# EAGLE board strobeshnik (EAGLE 5.04)
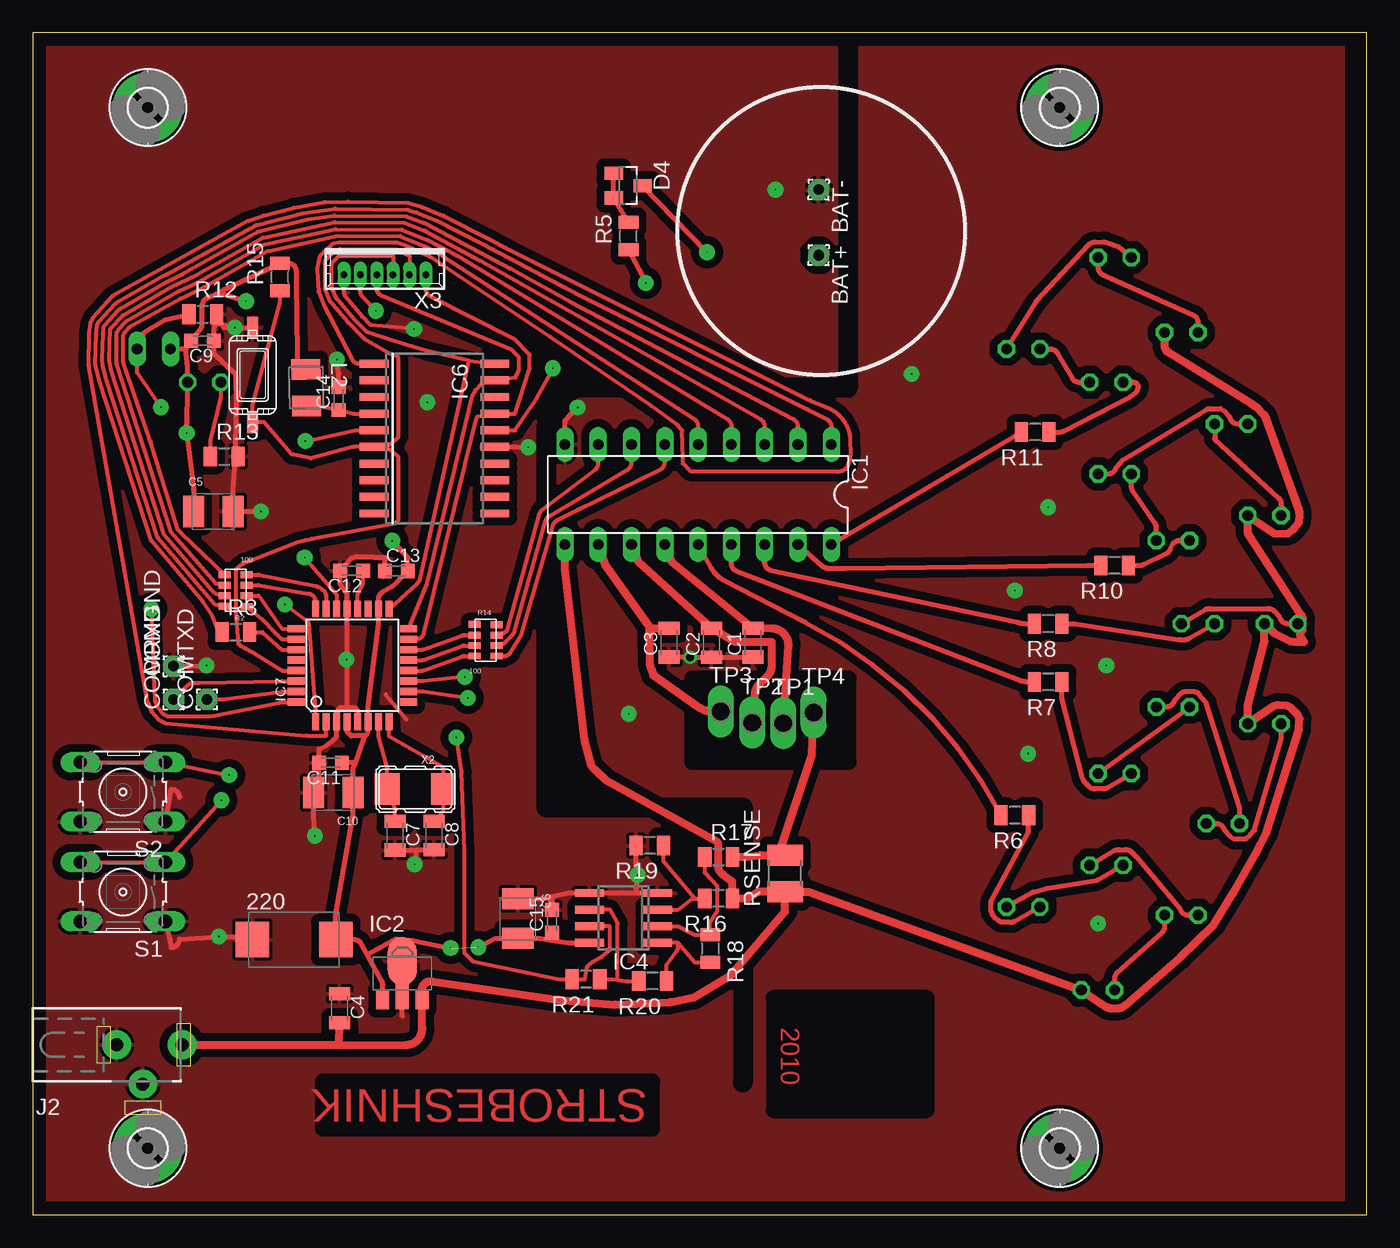
[diagram p0: board, top side]
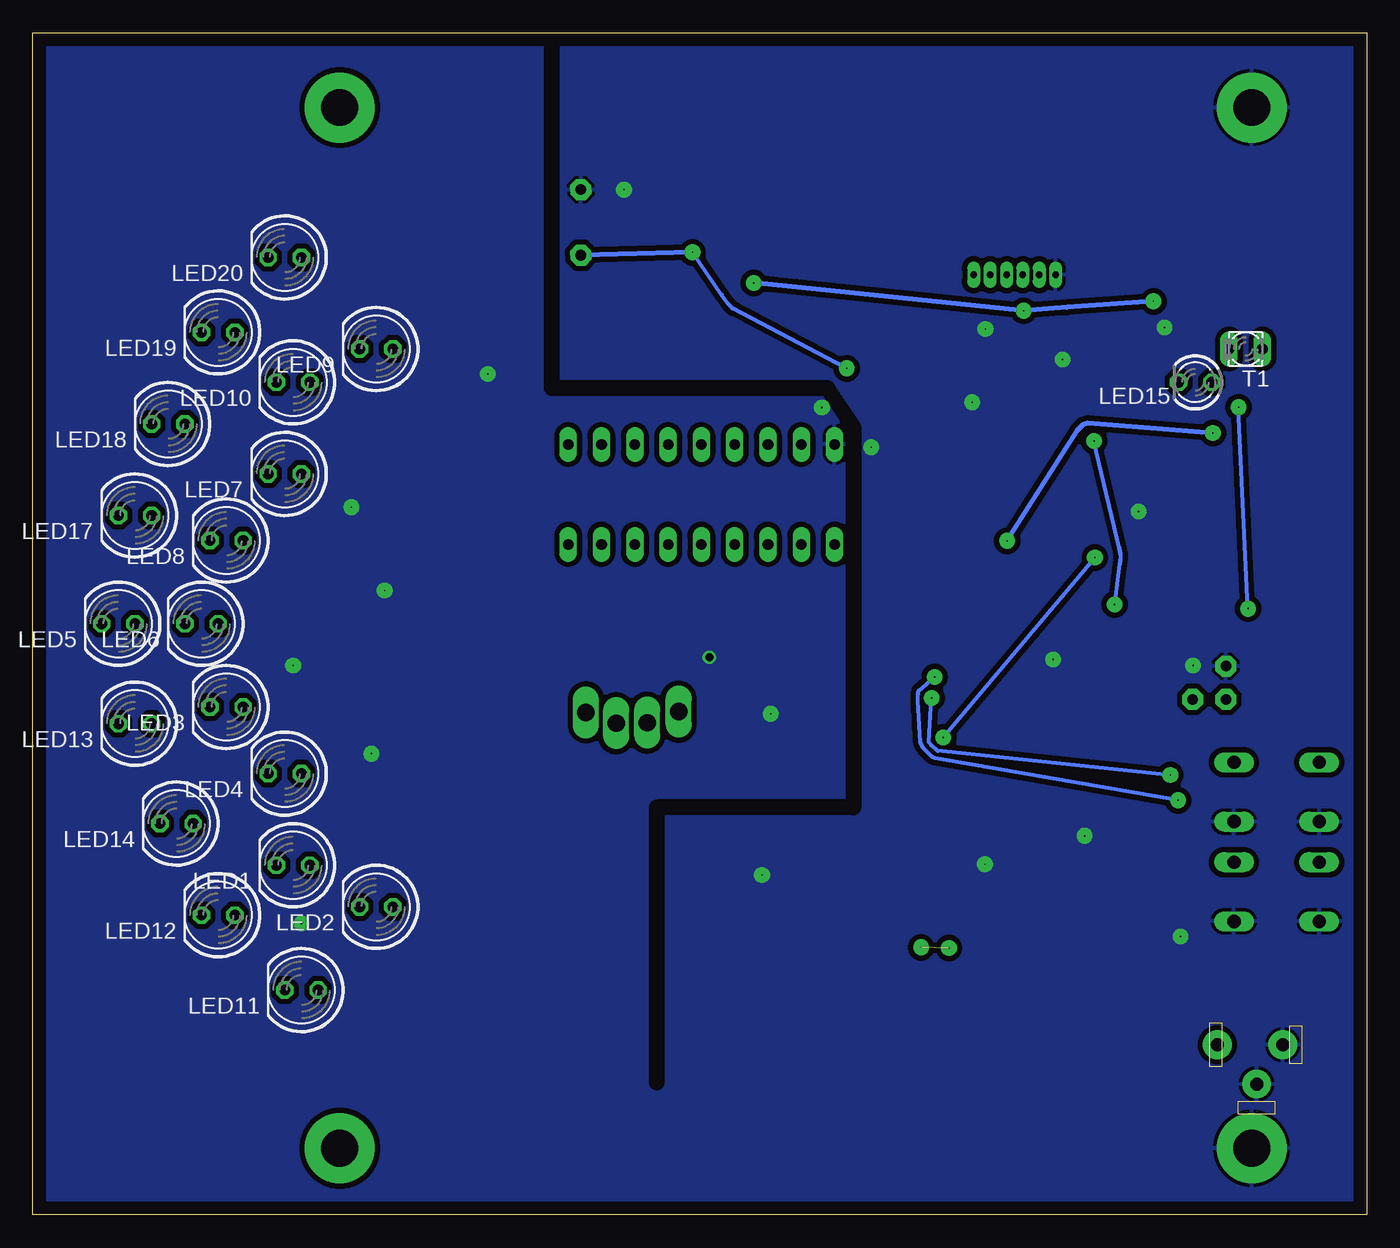
[diagram p1: board, bottom side, seen from below]

Size 101.78 x 90.16 mm. Coordinates in mm from the lower left corner, seen from the top.
Outline: 101.78,90.16 0,90.16 0,0 101.78,0 101.78,90.16
Copper layers (1*16): Top 0.035mm / dielectric 1.5mm / Bottom 0.035mm
Design rules "default": minimum track width 10mil, minimum drill 24mil, track to track 8mil, track to pad 8mil, pad to pad 8mil, via to via 8mil, smd to smd 8mil, copper to edge 40mil, drill to drill 8mil, minimum pad ring 10mil, minimum via ring 8mil, stop-mask expansion 4mil, vias tented up to drill 0mil, thermal gap 10mil
Net classes: 0 default: width 0.3 mm, drill 0.6 mm, clearance 0.25 mm; 1 supply1: width 0.4 mm, drill 0.6 mm, clearance 0.4 mm; 2 supply2: width 0.6 mm, drill 0.6 mm, clearance 0.4 mm
tRestrict: area 56.5,8 to 68.2,16.6; area 50.3,34.5 to 62.2,40.9; area 22.1,6.6 to 47.3,10.2; 6 lines
bRestrict: 6 lines

## Footprints (pad centres in the part's own frame; a part is rotated, then mirrored left to right if it is on the bottom)
D/7343-31R = smd 2.55 x 2.7: + 3.175,0; - -3.175,0
1,6/0,8 = drill 0.813 pad 1.6 octagon: 1 0,0
C0805K = smd 1 x 1.6: 1 -1.1,0; 2 1.1,0
SMC_B = smd 1.6 x 2.4: + -1.5,0; - 1.5,0
C0603K = smd 1.05 x 1.08: 1 -0.875,0; 2 0.875,0
SOT23@1 = smd 1 x 1.4: 1 -0.95,-1.1; 2 0.95,-1.1; 3 0,1.1
2,8-PAD = drill 2.8 pad 5.334 round: B2,8 0,0
DIL18 = drill 0.813 long: 1 -10.16,-3.81; 2 -7.62,-3.81; 3 -5.08,-3.81; 4 -2.54,-3.81; 5 0,-3.81; 6 2.54,-3.81; 7 5.08,-3.81; 8 7.62,-3.81; 9 10.16,-3.81; 10 10.16,3.81; 11 7.62,3.81; 12 5.08,3.81; 13 2.54,3.81; 14 0,3.81; 15 -2.54,3.81; 16 -5.08,3.81; 17 -7.62,3.81; 18 -10.16,3.81
SOT89 = smd 1 x 1.5: 1 -1.499,-1.981; 3 1.499,-1.981 | smd 1 x 2: 2 0,-1.727 | smd 2.2 x 3.7: 2@1 0,0.94
SO08 = smd 0.6 x 2.2: 1 -1.905,-2.6; 2 -0.635,-2.6; 3 0.635,-2.6; 4 1.905,-2.6; 5 1.905,2.6; 6 0.635,2.6; 7 -0.635,2.6; 8 -1.905,2.6
SO-20DW = smd 0.6 x 2.2: 1 -5.715,-4.6; 2 -4.445,-4.6; 3 -3.175,-4.6; 4 -1.905,-4.6; 5 -0.635,-4.6; 6 0.635,-4.6; 7 1.905,-4.6; 8 3.175,-4.6; 9 4.445,-4.6; 10 5.715,-4.6; 11 5.715,4.6; 12 4.445,4.6; 13 3.175,4.6; 14 1.905,4.6; 15 0.635,4.6; 16 -0.635,4.6; 17 -1.905,4.6; 18 -3.175,4.6; 19 -4.445,4.6; 20 -5.715,4.6
TQFP32-08 = smd 1.27 x 0.559: 1 -4.293,2.8; 2 -4.293,2; 3 -4.293,1.2; 4 -4.293,0.4; 5 -4.293,-0.4; 6 -4.293,-1.2; 7 -4.293,-2; 8 -4.293,-2.8; 17 4.293,-2.8; 18 4.293,-2; 19 4.293,-1.2; 20 4.293,-0.4; 21 4.293,0.4; 22 4.293,1.2; 23 4.293,2; 24 4.293,2.8 | smd 0.559 x 1.27: 9 -2.8,-4.293; 10 -2,-4.293; 11 -1.2,-4.293; 12 -0.4,-4.293; 13 0.4,-4.293; 14 1.2,-4.293; 15 2,-4.293; 16 2.8,-4.293; 25 2.8,4.293; 26 2,4.293; 27 1.2,4.293; 28 0.4,4.293; 29 -0.4,4.293; 30 -1.2,4.293; 31 -2,4.293; 32 -2.8,4.293
DCJ-SMALL = drill 1 pad 2.184 round: 1 0,3; 2 3,0; 3 0,-2
L3230M = smd 1.6 x 2.2: 1 -1.4,0; 2 1.4,0
LED5MM = drill 0.813 octagon: A -1.27,0; K 1.27,0
LED3MM = drill 0.813 octagon: A -1.27,0; K 1.27,0
RESSMD-YC16 = smd 0.508 x 0.914: R1$1 -1.23,-0.821; R1$2 -1.2,0.851; R2$1 -0.4,-0.821; R2$2 -0.4,0.851; R3$1 0.4,-0.821; R3$2 0.4,0.851; R4$1 1.2,-0.821; R4$2 1.2,0.851
R0805 = smd 1 x 1.5: 1 -1.05,0; 2 1.05,0
R1210 = smd 1.6 x 2.7: 1 -1.4,0; 2 1.4,0
B3F-10XX = drill 1.016 long: 1 -3.251,2.261; 2 3.251,2.261; 3 -3.251,-2.261; 4 3.251,-2.261
SW_IT1181 = smd 1.676 x 0.813: P$1 -3.61,0; P$2 3.61,0
BPX81 = drill 0.813 long: C 1.27,0; E -1.27,0
P1-13Y = drill 1.321 pad 1.905 long: 1 0,0
GEYER_KX-12B = smd 1.9 x 2.4: P$1 -2.14,0; P$2 2.14,0
53047-06 = drill 0.5 pad 0.698 long: 1 3.125,0.45; 2 1.875,0.45; 3 0.625,0.45; 4 -0.625,0.45; 5 -1.875,0.45; 6 -3.125,0.45

## Placement (x,y rotation side)
220  [D/7343-31R]  19.94,21 0 top
BAT+  [1,6/0,8]  59.96,73.2 269 top
BAT-  [1,6/0,8]  59.96,78.2 269 top
C1  10nF  [C0805K]  54.94,43.65 90 top
C2  10nF  [C0805K]  51.78,43.63 90 top
C3  10nF  [C0805K]  48.55,43.65 90 top
C4  4.7uF  [C0805K]  23.42,15.76 270 top
C5  10uF  [SMC_B]  13.78,53.66 0 top
C6  10uF/16V  [SMC_B]  37.02,22.6 270 top
C7  20  [C0805K]  27.64,28.93 270 top
C8  20  [C0805K]  30.62,28.94 270 top
C9  0.1  [C0603K]  12.95,66.67 180 top
C10  10uF  [SMC_B]  22.93,32.21 180 top
C11  100nF  [C0603K]  22.72,34.49 180 top
C12  100nF  [C0603K]  24.33,49.13 180 top
C13  100nF  [C0603K]  27.74,49.12 0 top
C14  100nF  [C0603K]  23.34,62.26 90 top
C15  100nF  [C0603K]  39.62,22.4 90 top
COMGND  [1,6/0,8]  10.74,41.85 90 top
COMRXD  [1,6/0,8]  10.74,39.31 90 top
COMTXD  [1,6/0,8]  13.28,39.31 90 top
D4  BAT54C  [SOT23@1]  45.42,78.51 270 top
H1  MOUNT-PAD-ROUND2.8  [2,8-PAD]  8.77,84.45 0 top
H2  MOUNT-PAD-ROUND2.8  [2,8-PAD]  78.36,84.45 0 top
H3  MOUNT-PAD-ROUND2.8  [2,8-PAD]  8.77,5.08 0 top
H4  MOUNT-PAD-ROUND2.8  [2,8-PAD]  78.36,5.08 0 top
IC1  [DIL18]  50.76,54.95 180 top
IC2  78L05F  [SOT89]  28.19,18.41 0 top
IC4  LM358D  [SO08]  45.08,22.65 90 top
IC6  DS3234  [SO-20DW]  30.66,59.21 270 top
IC7  MEGA8-AI  [TQFP32-08]  24.38,41.91 90 top
J2  [DCJ-SMALL]  8.4,12.97 270 top
L2  [L3230M]  20.87,63.1 271 top
LED1  ARL-5053UYC  [LED5MM]  81.92,26.67 180 bottom
LED2  [LED5MM]  75.57,23.49 180 bottom
LED3  [LED5MM]  87,38.73 180 bottom
LED4  [LED5MM]  82.55,33.66 180 bottom
LED5  [LED5MM]  95.25,45.09 180 bottom
LED6  [LED5MM]  88.9,45.09 180 bottom
LED7  [LED5MM]  82.55,56.52 180 bottom
LED8  [LED5MM]  87,51.43 180 bottom
LED9  [LED5MM]  75.57,66.04 180 bottom
LED10  [LED5MM]  81.92,63.5 180 bottom
LED11  [LED5MM]  81.28,17.14 180 bottom
LED12  [LED5MM]  87.63,22.86 180 bottom
LED13  [LED5MM]  93.98,37.46 180 bottom
LED14  [LED5MM]  90.81,29.84 180 bottom
LED15  L-34F3C  [LED3MM]  13.09,63.5 180 bottom
LED17  [LED5MM]  93.98,53.34 180 bottom
LED18  [LED5MM]  91.44,60.32 180 bottom
LED19  [LED5MM]  87.63,67.31 180 bottom
LED20  [LED5MM]  82.55,73.02 180 bottom
R2  100  [RESSMD-YC16]  15.49,47.62 90 top
R3  100  [R0805]  15.49,44.45 0 top
R5  10K  [R0805]  45.45,74.66 90 top
R6  100  [R0805]  74.93,30.48 180 top
R7  100  [R0805]  77.47,40.64 180 top
R8  330  [R0805]  77.47,45.09 180 top
R10  100  [R0805]  82.55,49.53 180 top
R11  100  [R0805]  76.47,59.7 180 top
R12  5K  [R0805]  12.97,68.7 0 top
R13  220  [R0805]  14.61,57.85 0 top
R14  100  [RESSMD-YC16]  34.54,43.81 270 top
R15  10K  [R0805]  18.86,71.54 90 top
R16  9K  [R0805]  52.32,24.13 180 top
R17  9K  [R0805]  52.32,27.3 0 top
R18  1K  [R0805]  51.69,20.32 270 top
R19  1K  [R0805]  47.07,28.17 180 top
R20  1K  [R0805]  47.29,17.84 180 top
R21  110K  [R0805]  42.21,17.97 180 top
RSENSE  0.3  [R1210]  57.4,26.03 90 top
S1  [B3F-10XX]  6.88,24.64 180 top
S2  [B3F-10XX]  6.88,32.26 180 top
SW1  BUTTON-IT_1181  [SW_IT1181]  16.78,64.07 270 top
T1  L-32P3C  [BPX81]  9.24,66.04 180 bottom
TP1  TPPAD1-13Y  [P1-13Y]  57.26,37.5 0 top
TP2  TPPAD1-13Y  [P1-13Y]  54.89,37.54 0 top
TP3  TPPAD1-13Y  [P1-13Y]  52.49,38.39 0 top
TP4  TPPAD1-13Y  [P1-13Y]  59.57,38.33 0 top
X2  20.000  [GEYER_KX-12B]  29.19,32.47 180 top
X3  53047-06  [53047-06]  26.87,72.15 180 top

## Library data of the parts
220 C1-C15 L2 R3 R5-R8 R10-R13 R15-R21 RSENSE = rcl
BAT+ BAT- COMGND COMRXD COMTXD = wirepad
D4 = diode
H1-H4 = holes
IC1 = uln-udn
IC2 IC4 = linear
IC6 = 0-ds3234
IC7 = atmel
J2 LED1-LED15 LED17-LED20 R2 R14 SW1 X2 = 0-svo
S1 S2 = switch-omron
T1 = opto-trans-siemens
TP1-TP4 = testpad
X3 = con-molex

## Nets
+5V: 220.+ C5.+ C6.- C9.2 C10.+ C11.1 C13.2 C15.1 IC2.1 IC4.8 IC7.4 IC7.6 IC7.18 L2.1 LED15.A R5.1 R15.2 T1.C X3.2
+12V: C4.2 IC1.10 IC2.3 J2.1 LED5.A LED11.A LED13.A LED17.A LED19.A R16.1 RSENSE.1
BTN+: IC7.11 S1.3 S1.4
BTNSET: IC7.10 S2.3 S2.4
GND: 220.- BAT-.1 C1.1 C2.1 C3.1 C4.1 C5.- C6.+ C7.2 C8.2 C9.1 C10.- C11.2 C12.2 C13.1 C14.2 C15.2 COMGND.1 H1.B2,8 H3.B2,8 IC1.9 IC2.2 IC2.2@1 IC4.4 IC4.5 IC6.15 IC7.3 IC7.5 IC7.21 J2.2 J2.3 R12.2 R13.2 R19.2 S1.1 S1.2 S2.1 S2.2 SW1.P$1 X3.1
INDEX: IC7.32 R12.1 T1.E
L1: IC1.5 R2.R4$2
L1X: IC7.23 R2.R4$1
L2: IC1.4 R2.R3$2
L2X: IC7.24 R2.R3$1
L3: IC1.3 R2.R2$2
L3X: IC7.25 R2.R2$1
L4: IC1.2 R2.R1$2
L4X: IC7.26 R2.R1$1
L5: IC1.1 R3.1
L5X: IC7.27 R3.2
M1: IC1.6 R14.R4$2
M2: IC1.7 R14.R3$2
M3: IC1.8 R14.R2$2
MISO: IC6.19 IC7.16 X3.3
MOSI: IC6.17 IC7.15 X3.6
N$1: D4.1 D4.2 R5.2
N$2: IC6.18
N$3: C12.1 IC7.20
N$4: IC1.14 R6.2
N$5: IC1.15 R7.2
N$6: IC1.16 R8.2
N$7: IC1.17 R10.2
N$8: IC1.18 R11.2
N$9: BAT+.1 D4.3 IC6.16
N$10: C1.2 IC1.13 TP1.1
N$11: C2.2 IC1.12 TP2.1
N$12: C3.2 IC1.11 TP3.1
N$13: C7.1 IC7.7 X2.P$2
N$14: LED1.K LED2.A
N$15: LED3.K LED4.A
N$16: LED5.K LED6.A
N$17: LED7.K LED8.A
N$18: LED9.K LED10.A
N$19: LED2.K R6.1
N$20: LED4.K R7.1
N$21: LED6.K R8.1
N$22: LED8.K R10.1
N$23: LED10.K R11.1
N$24: C8.1 IC7.8 X2.P$1
N$25: LED1.A LED12.K
N$26: LED11.K LED12.A
N$27: LED13.K LED14.A
N$29: LED17.K LED18.A
N$30: LED19.K LED20.A
N$31: IC7.14 R14.R2$1
N$32: IC7.13 R14.R3$1
N$33: LED15.K R13.1
N$34: IC7.12 R14.R4$1
N$35: IC4.1 R18.2 R20.1
N$36: IC4.2 R17.1 R18.1
N$37: IC4.3 R16.2 R19.1
N$38: R17.2 RSENSE.2 TP4.1
N$39: IC4.6 R20.2 R21.1
N$40: LED3.A LED14.K
N$41: LED7.A LED18.K
N$42: LED9.A LED20.K
N$53: C14.1 IC6.4 L2.2
RESET#: IC6.6 IC7.29 R15.1 SW1.P$2 X3.5
RTCINT: IC6.5 IC7.1
RTCSEL#: IC6.1 IC7.2
RXD: COMRXD.1 IC7.30
SCK: IC6.20 IC7.17 X3.4
SENSE: IC4.7 IC7.22 R21.2
TXD: COMTXD.1 IC7.31

## Tracks (layer width: path | path; a pad name or v marks a point on that pad's centre or on a via)
+5V  (via drill 0.1 pad 1.2)  (1 unrouted)
  Top 0.3: v26.18,68.96 25.17,70.01 arc-44 24.99,70.45 X3.2
  Top 0.32: 20.21,64.5 L2.1
  Top 0.4: v34,20.41 35.32,21.1 C6.- 38.72,21.1 39.54,20.96 | 25.52,19.84 27.74,21.05 28.95,20.94 v31.88,20.36 | v46.77,71.09 46.77,71.14 R5.1 | 25.52,19.84 25.07,20.67 arc61 24.51,21 220.+ 23.11,22.85 24.43,30.51 C10.+ 24.43,34.03 24.62,34.49 | 14.23,70.34 | 14.23,70.34 v16.28,69.68 | 14.23,70.34 | 14.23,70.34 14.58,70.58 R15.2 19.47,72.59 arc-90 20.1,71.95 20.1,71.17 20.11,71.07 20.19,65.8 20.21,64.5 | 14.23,70.34 13.23,69.93 13.09,69.78 12.92,69.38 12.92,67.94 arc-39 12.78,67.54 C9.2 11.67,66.04 | C5.+ 12.28,55.36 v11.74,59.64 11.82,62.34 LED15.A 11.82,64.66 | 11.67,66.04 T1.C | 25.31,36.53 25.33,36.48 24.62,34.49 | 24.62,34.49 C11.1 | 39.54,20.96 40.88,20.74 IC4.8 | C15.1 39.57,21.14 39.54,20.96 | IC2.1 26.7,17.52 arc29 26.62,17.83 25.52,19.84 | 25.31,36.53 | 25.31,36.53 25.45,36.6 25.58,36.82 IC7.6 25.58,38.75 26.38,45.07 IC7.18 26.38,46.97 arc-60 26.7,47.52 27.43,47.94 27.75,48.2 C13.2 28.61,50.16 v27.44,51.41 | 25.31,36.53 24.31,36.53 23.98,36.86 IC7.4 | 11.82,64.66 | 11.82,64.66 11.67,66.04
  Bottom 0.4: v46.77,71.09 v26.18,68.96 22.88,69.21 v16.28,69.68 | v27.44,51.41 22.06,59.86 21.64,60.28 21.3,60.41 v11.74,59.64
+12V
  Top 0.6: IC1.10 40.6,49.28 42.11,36.25 42.63,34.26 42.85,33.99 43.77,33.12 52.27,28.41 52.3,28.23 52.32,28.11 52.33,26.34 52.63,25.98 53.37,25.42 R16.1 54.57,24.13 55.35,24.63 RSENSE.1 | RSENSE.1 57.4,23.13 53.33,18.33 50.47,16.59 48.65,16.23 44.43,16.03 40.07,16.42 30.4,17.81 arc96 29.69,17.18 IC2.3 29.72,14.24 arc-91 28.45,12.96 23.39,12.96 | LED19.A 86.36,66.3 arc58 86.66,65.76 92.95,61.87 93.45,61.53 93.97,60.99 94.09,60.8 96.6,53.83 96.64,53.62 96.66,53.27 96.58,52.77 96.18,52.28 95.75,51.96 94.71,51.98 LED17.A 92.71,51.98 96.79,45.74 96.9,45.5 96.86,44.6 96.69,44.25 97.01,43.68 96.25,43.7 95.95,43.74 94.71,44.37 LED5.A 93.98,43.73 92.71,38.82 LED13.A 94.65,38.78 94.98,38.88 95.73,38.82 95.95,38.71 96.51,38.15 96.65,37.87 96.61,36.98 94.11,29.09 93.32,27.57 91.62,24.56 90.11,22.11 87.56,19.64 83.39,16.02 83.24,15.91 arc-31 82.92,15.78 82.67,15.75 82.21,15.76 arc-32 81.87,15.87 LED11.A 59.2,24.64 RSENSE.1 | J2.1 23.39,12.96 | 23.39,12.96 C4.2
BTN+  (via drill 0.1 pad 1.2)
  Top 0.3: 29.77,40.71 IC7.11 | S1.4 S1.3 v14.4,31.62
  Top 0.32: v32.96,41.03 29.77,40.71
  Bottom 0.32: v14.4,31.62 32.95,34.84 33.17,34.93 33.86,35.63 34.04,36.03 34.25,39.2 34.23,39.73 34.17,39.99 v32.96,41.03
BTNSET  (via drill 0.1 pad 1.2)
  Top 0.3: S2.4 S2.3 v14.98,33.55
  Top 0.32: v33.2,39.42 29.77,39.91 IC7.10
  Bottom 0.32: v14.98,33.55 32.75,35.39 33.22,35.81 33.41,36.08 v33.2,39.42
GND  (via drill 0.1 pad 1.2, 0.61 pad 1.02)
  Top 0.3: v29.1,67.57 29.09,67.61 25.74,67.91 25.13,68.53 23.89,70.02 arc-40 23.74,70.42 X3.1 | 28.51,37.78 26.92,39.69
  Top 0.4: v41.57,61.59 40.6,60.58 IC1.9 | v21.52,28.91 21.43,30.51 C10.- 21.84,33.45 C11.2 21.84,35.53 22.55,35.91 23.18,36.48 IC7.3 23.18,38.24 23.32,38.57 23.46,38.7 23.98,38.7 | R19.2 46.02,26.92 46.14,25.97 v46.14,25.93 | 46.08,24.55 44.92,24.58 44.08,24.55 IC4.5 40.88,24.55 39.62,24.3 39.62,24.2 | 46.08,24.55 46.1,25.59 v46.14,25.93 | v46.14,25.93 | v46.14,25.93 | C3.1 49.85,42.55 v50.16,42.53 50.48,42.53 C2.1 53.08,42.53 53.64,42.55 C1.1 | v17.4,53.66 16.58,53.66 C5.- 15.28,55.36 15.45,57.39 | 28.19,15.19 IC2.2 IC2.2@1 | v37.8,58.55 37.7,58.55 36.85,58.57 IC6.15 | 15.45,57.39 | 15.45,57.39 R13.2 | 15.45,57.39 15.54,61.77 15.52,63.98 15.43,64.12 13.83,65.64 C9.1 13.83,67.69 arc-90 13.86,67.72 13.9,68 | v23.2,65.24 23.34,64.16 C14.2 | 14.6,67.89 15.87,67.68 SW1.P$1 | 13.9,68 14.6,67.89 | v15.42,67.69 14.56,67.7 14.6,67.89 | 13.9,68 R12.2 | 23.98,42.36 v23.93,42.36 | 23.98,38.7 23.98,42.36 | 23.98,42.36 23.98,45.07 IC7.21 23.98,47.34 23.45,48.09 C12.2 24.33,50.09 24.53,50.16 24.71,50.21 25.95,50.18 25.98,50.16 26.86,50.16 C13.1 | v13.24,41.89 13.08,41.89 12.04,41.85 COMGND.1 | 29.25,27.84 | 29.25,27.84 29.25,27.83 v29.13,26.75 | 29.25,27.84 28.94,27.83 C7.2 | 29.25,27.84 29.32,27.84 C8.2 | 39.62,24.2 C15.2 | 39.62,24.2 38.72,24.1 C6.+ | 46.08,24.55 IC4.4 | 23.98,38.7 24.46,38.7 | 24.46,38.7 | 24.46,38.7 24.54,38.7 24.78,38.46 IC7.5 | S2.1 10.56,32.46 arc-90 11.19,31.83 | S1.1 10.56,20.4 arc90 11.19,21.03 v14.19,21.23 16.53,21.23 arc-90 220.-
  other vias: 56.66,78.2 77.47,53.98 74.93,47.62 81.92,41.91 81.28,22.23 30.1,61.98 75.95,35.18 45.47,38.23 67.06,64.14
  pour Bottom (isolate 0.406): -6.08,90.17 103.78,90.17 103.78,0 -6.08,0
  pour Top (isolate 0.61): 99.95,90.8 99.95,-0.63 -12.45,-0.63 -12.45,90.17 arc-90 -11.81,90.8
INDEX  (via drill 0.1 pad 1.2)
  Top 0.3: 9.52,38.76 9.96,38.2 10.27,38.05 13.47,38.02 13.82,38.07 19,39.11 IC7.32 | 9.35,39.21 v9.05,46.24
  Top 0.32: 9.52,38.76 9.35,39.21 | T1.E 7.97,64.26 v9.78,61.6
  Top 0.4: R12.1 10.1,68.26 8.51,67.31 T1.E
  Bottom 0.32: v9.05,46.24 v9.78,61.6
L1
  Top 0.3: R2.R4$2 11.3,52.03 11.05,52.28 9.01,58.94 7.16,64.28 6.92,65.05 6.92,67.15 7.01,67.29 7.37,67.68 11.28,69.89 13.07,70.77 17.93,73.51 23.26,74.66 28.03,74.65 30.01,73.83 31.28,73.13 50.47,60.7 arc-57 50.76,60.16 IC1.5
L1X
  Top 0.3: R2.R4$1 17.23,48.82 21.55,47.97 arc-20 21.75,47.9 22.07,47.71 arc-59 22.38,47.16 IC7.23
L2
  Top 0.3: R2.R3$2 13.94,48.16 10.54,52.07 6.41,64.9 6.4,67.28 6.55,67.53 7.09,68.12 11.15,70.45 12.77,71.22 17.73,74.02 23.07,75.18 28.16,75.16 30.16,74.35 32.32,73.18 53,60.69 arc-59 53.3,60.15 IC1.4
L2X
  Top 0.3: IC7.24 21.58,46.76 arc81 21.05,47.39 17.23,48.02 R2.R3$1
L3
  Top 0.3: R2.R2$2 13.97,47.37 13.71,47.59 10.04,51.86 5.97,64.42 5.83,65.25 5.9,67.54 5.97,67.65 6.84,68.59 10.53,70.73 12.53,71.69 17.57,74.54 23.04,75.72 28.38,75.66 29.92,75.07 34.11,72.79 55.52,60.69 arc-61 55.84,60.14 IC1.3
L3X
  Top 0.3: IC7.25 19,44.71 17.23,47.23 R2.R2$1
L4
  Top 0.3: R2.R1$2 13.87,46.59 9.54,51.66 5.64,63.62 5.33,64.81 5.3,65.24 5.36,67.19 5.41,67.75 5.49,67.87 6.57,69.04 10.2,71.15 11.41,71.73 17.29,75.01 20.98,75.92 23,76.22 28.49,76.16 29.92,75.64 36.47,72.16 40.99,69.65 58.04,60.69 arc-62 58.38,60.12 IC1.2
L4X
  Top 0.3: R2.R1$1 17.47,45.46 18.53,44.35 19,43.91 IC7.26
L5
  Top 0.3: IC1.1 60.92,60.12 arc63 60.58,60.68 59.07,61.45 41.64,70.17 34.28,74.06 30.77,75.84 29.32,76.44 28.6,76.67 23.07,76.75 20.59,76.38 17.05,75.48 10.18,71.71 9.98,71.62 6.33,69.52 5.03,68.12 4.93,67.94 4.85,67.12 4.78,64.86 5.1,63.55 9.03,51.45 13,46.76 13.69,45.73 14.13,44.67 R3.1
L5X
  Top 0.3: R3.2 17.5,44.45 19,43.11 IC7.27
M1
  Top 0.254: 37.06,43.9 37.28,44.28
  Top 0.3: R14.R4$2 35.92,42.61 arc59 36.46,42.92 37.06,43.9 | 37.28,44.28 39.6,52.3 39.69,52.6 arc-46 40.01,52.98 41.59,53.79 47.87,56.84 arc64 48.22,57.41 IC1.6
M2
  Top 0.254: R14.R3$2 35.91,43.55
  Top 0.3: 35.91,43.55 36.61,44.25 arc29 36.77,44.52 39.13,52.92 arc-44 39.41,53.3 45.37,56.83 arc59 45.68,57.37 IC1.7
M3
  Top 0.3: R14.R2$2 35.81,44.32 arc60 36.26,44.77 37.52,49.32 38.68,53.48 arc-37 38.91,53.82 42.89,56.82 arc53 43.14,57.33 IC1.8
MISO
  Top 0.3: 35.25,63.66 IC6.19 | IC7.16 30.07,48.14 33.57,62.5 33.77,62.91 34.27,63.44 35.25,63.66 | 35.25,63.66 | 35.25,63.66 36.85,63.88 37.1,64.45 37.1,65.4 36.53,65.97 26.62,70.1 arc-66 26.24,70.68 X3.3
MOSI
  Top 0.3: X3.6 29.99,70.63 arc59 30.3,70.08 36.74,66.79 37.92,65.61 37.92,64.55 36.78,61.11 IC6.17 33.95,60.91 33.73,60.33 29.86,44.39 arc-76 29.24,43.91 IC7.15
N$1
  Top 0.4: R5.2 D4.2 D4.1
N$3
  Top 0.32: C12.1 25.2,48.13 24.78,47.3 IC7.20
N$4
  Top 0.4: IC1.14 51.73,49.39 arc32 52.69,48.41 58.93,45.21 arc-35 R6.2
N$5
  Top 0.4: IC1.15 53.3,49.68 arc60 53.62,49.13 74.83,40.98 arc30 76.1,40.64 R7.2
N$6
  Top 0.4: IC1.16 55.84,49.77 arc71 56.27,49.17 75.02,45.22 arc19 75.84,45.09 R8.2
N$7
  Top 0.4: R10.2 80.5,49.53 62.02,49.32 60.67,49.32 arc-42 60.25,49.48 IC1.17
N$8
  Top 0.4: IC1.18 R11.2
N$9  (via drill 0.1 pad 1.2)
  Top 0.32: v39.68,64.57 38.19,61.89 36.81,59.84 IC6.16
  Top 0.4: v51.45,73.41 D4.3
  Bottom 0.32: v39.68,64.57 48.41,69.14 48.71,69.46 49.22,70.18 v51.45,73.41
  Bottom 0.4: v51.45,73.41 BAT+.1
N$10
  Top 0.6: C1.2 55.3,44.75 | IC1.13 48.77,49.78 C1.2 | TP1.1 57.66,43.45 arc89 56.41,44.72 C1.2
N$11
  Top 0.6: IC1.12 46.23,49.78 C2.2 53.59,43.69 56.13,43.69 56.39,43.69 56.39,41.93 arc-45 56.02,41.03 55.49,40.5 arc45 55.12,39.91 55.12,38.15 TP2.1
N$12
  Top 0.6: 47.05,44.75 47.1,41.89 47.35,41.15 50.65,38.82 arc45 52.41,38.39 TP3.1 | 47.05,44.75 C3.2 | 47.05,44.75 arc45 46.94,45 43.69,49.53 IC1.11
N$13
  Top 0.32: C7.1 27.64,30.99 X2.P$2 27.05,34.13 26.38,36.52 IC7.7
N$14
  Top 0.4: LED2.A 76.29,24.62 77.37,24.9 81.21,25.53 LED1.K
N$15
  Top 0.4: LED4.A LED3.K
N$16
  Top 0.4: LED6.A 89.46,46.16 arc-30 89.78,46.25 94.26,46.25 arc-48 94.73,46.04 95.11,45.62 95.19,45.45 arc65 95.76,45.09 LED5.K
N$17
  Top 0.4: LED8.A 85.73,52.4 arc35 85.61,52.76 83.93,55.19 arc-35 83.82,55.55 LED7.K
N$18
  Top 0.4: LED9.K 77.63,66.04 arc-60 78.18,65.73 79.3,63.81 arc60 79.85,63.5 LED10.A
N$19
  Top 0.4: R6.1 75.98,29.39 arc-28 75.9,29.09 73.15,24 73.11,23.77 73.09,23.38 73.12,23.19 arc34 73.27,22.85 73.5,22.6 73.67,22.46 arc36 74.03,22.33 74.56,22.3 arc33 74.91,22.38 LED2.K
N$20
  Top 0.4: R7.1 78.52,39.39 80.07,33.36 80.15,33.17 arc6 80.18,33.12 80.21,33.07 80.58,32.68 arc46 81.04,32.49 81.67,32.49 arc30 81.98,32.58 LED4.K
N$21
  Top 0.4: R8.1 79.52,45.09 87.45,43.88 arc10 87.56,43.87 87.91,43.88 arc29 88.21,43.96 LED6.K
N$22
  Top 0.4: R10.1 84.46,49.53 arc26 84.73,49.59 86.46,50.42 arc39 86.76,50.72 86.93,51.07 arc-64 87.51,51.43 LED8.K
N$23
  Top 0.4: R11.1 78.37,59.7 arc27 78.66,59.77 83.69,62.38 83.84,62.47 84.25,62.84 84.35,63.12 arc89 83.97,63.5 LED10.K
N$24
  Top 0.32: C8.1 31.33,30.81 X2.P$1 31.33,34.13 27.18,36.52 IC7.8
N$25
  Top 0.4: LED1.A 82.48,27.76 arc-30 82.8,27.85 83.39,27.86 arc-44 83.83,27.68 84.21,27.32 87.54,23.33 87.57,23.24 arc67 88.16,22.86 LED12.K
N$26
  Top 0.4: LED12.A 86.36,21.98 arc-48 86.15,21.51 82.76,18.49 arc48 82.55,18.02 LED11.K | LED11.K arc90 LED11.K
N$27
  Top 0.4: LED13.K 95.25,36.3 93.2,29.33 92.89,28.99 92.55,28.68 91.65,28.68 91.37,28.85 90.95,29.3 90.87,29.48 arc65 90.29,29.84 LED14.A
N$29
  Top 0.4: LED18.A 90.17,59.16 arc90 90.17,59.16 95.04,54.69 arc-47 95.25,54.22 LED17.K
N$30
  Top 0.4: LED20.A 81.28,72.28 arc66 81.66,71.7 88.52,68.64 arc-66 88.9,68.06 LED19.K
N$31
  Top 0.3: IC7.14 29.74,43.11 32.73,44.18 arc-20 32.95,44.21 R14.R2$1
N$32
  Top 0.3: IC7.13 29.74,42.31 32.73,43.38 arc-20 32.95,43.41 R14.R3$1
N$33
  Top 0.32: R13.1 13.56,59.06 14.36,62.38 LED15.K
N$34
  Top 0.3: IC7.12 29.74,41.51 32.73,42.58 arc-20 32.95,42.61 R14.R4$1
N$35
  Top 0.32: R20.1 48.34,19.05 49.17,20.13 49.24,20.32 49.24,20.74 | 49.24,20.74 IC4.1 49.24,20.74 | 49.24,20.74 50.48,19.27 R18.2
N$36
  Top 0.32: IC4.2 49.24,22.01 50.48,21.37 R18.1 51.69,22.33 52.23,23.19 52.24,24.85 52.22,25.08 51.27,26.09 R17.1
N$37
  Top 0.32: R19.1 48.12,26.96 50.53,24.13 | 50.53,24.13 50.31,24.13 49.24,23.28 IC4.3 | 50.53,24.13 R16.2
N$38
  Top 0.6: R17.2 54.41,27.3 55.51,27.44 56.9,27.44 | 56.9,27.44 RSENSE.2 | 56.9,27.44 59.44,35.05 TP4.1
N$39
  Top 0.32: 44.62,17.92 45.28,17.84 R20.2 | 44.62,17.92 44.22,17.97 R21.1 | 44.62,17.92 44.62,22.23 44.04,23.28 IC4.6 | 44.62,17.92
N$40
  Top 0.4: LED14.K 92.08,31.01 89.51,39.09 89.02,39.69 arc51 88.52,39.92 88.01,39.91 arc30 87.69,39.82 87.56,39.75 87.15,39.29 87.06,39.1 arc-65 86.48,38.73 LED3.A
N$41
  Top 0.4: LED7.A 82.04,56.52 arc65 82.61,56.88 82.67,57 83.2,57.59 89.6,61.45 89.8,61.49 90.61,61.49 90.88,61.33 91.29,60.89 91.38,60.69 arc65 91.95,60.32 LED18.K
N$42
  Top 0.4: LED9.A | LED9.A 76.52,69.59 arc-11 76.59,69.69 80.56,73.98 arc-46 81.01,74.19 81.66,74.2 arc-21 81.88,74.17 82.86,73.83 LED20.K
N$53
  Top 0.32: L2.2 21.82,61.72 C14.1 | C14.1 23.42,61.4 24.5,61.11 IC6.4 | C14.1
RESET#
  Top 0.3: 19.76,58.01 17.64,60.46 SW1.P$2 | 24.5,58.57 21.23,57.69 | 26.7,58.54 26.75,58.6 27.33,58.8 27.9,59.37 27.9,65.4 27.33,65.65 25.3,66.83 24.05,68.08 22.67,69.67 22.3,70.63 22.3,72.63 22.35,72.85 23.09,73.59 23.42,73.65 27.61,73.64 27.71,73.63 28.74,73.14 X3.5 | 18.86,69.61 R15.1 | 26.7,58.54 | 26.7,58.54 IC6.6 | 26.7,58.54 27.36,58.32 27.9,57.78 27.9,53.02 27.65,52.77 21.85,51.67 arc6 20.26,51.33 16.16,49.74 15.75,49.47 15.51,49.22 15.51,46.04 15.7,43.55 15.84,43.4 16.18,43.2 16.83,42.86 19.03,41.51 IC7.29 | 26.7,58.54
  Top 0.32: 21.23,57.69 19.76,58.01 | 18.86,69.61 16.78,61.76 SW1.P$2 | IC6.6 24.5,58.57
RTCINT  (via drill 0.1 pad 1.2)
  Top 0.3: v20.81,59.02 24.61,59.84 IC6.5 | v19.24,46.55 20.99,45.25 21.08,45.09 21.58,38.6 IC7.1
  Bottom 0.3: v19.24,46.55 18.82,49.68 arc-27 18.87,50.85 v20.81,59.02
RTCSEL#
  Top 0.3: IC6.1 24.92,64.92 arc-63 24.35,65.27 22.2,69.43 21.81,70.43 21.7,72.02 21.7,72.18 21.82,72.83 21.89,73.1 22.19,73.4 22.87,74.06 23.37,74.16 27.81,74.15 28.36,73.97 30.31,73.08 31.41,72.32 39.44,66.98 47.18,61.7 49.16,60.27 49.55,59.84 49.6,57.66 arc-2 49.6,57.33 50.24,56.69 61.25,56.69 arc59 62.12,57 62.31,57.64 62.4,58.03 62.35,59.2 arc35 61.85,60.6 61.76,60.72 arc30 60.74,61.51 59.34,62.1 36.04,73.77 34.94,74.36 31.32,76.2 29.56,76.91 28.64,77.19 24.05,77.28 22.3,77.24 arc9 22.21,77.23 19.94,76.82 17.59,76.21 16.45,75.81 6.11,70.1 4.6,68.45 4.41,68.04 4.31,67.21 4.27,64.82 8.78,39.11 9.07,38.36 9.61,37.77 10.13,37.49 20.88,36.55 22.38,36.55 IC7.2
RXD
  Top 0.3: 12.68,40.57 12.26,40.57 arc45 11.81,40.39 COMRXD.1
  Top 0.32: 12.68,40.57 19,40.71 IC7.30
SCK
  Top 0.3: 33.31,65.14 30.02,65.91 28.99,66.23 27.62,66.65 25.5,67.33 24.55,68.29 23.14,69.94 22.82,70.74 22.81,70.93 22.81,72.56 22.84,72.62 23.34,73.12 23.42,73.14 26.68,73.14 27.11,73.14 27.49,73.14 X3.4 | 33.31,65.14 29.57,48.65 arc-43 29.39,48.22 29.36,48.19 IC7.17 | 33.31,65.14 IC6.20
SENSE  (via drill 0.1 pad 1.2)
  Top 0.3: 23.18,47.3 IC7.22
  Top 0.32: v32.32,36.41 32.74,33.8 32.94,27.72 32.94,19.97 33.56,19.35 40.2,17.97 R21.2 42.12,17.97 42.3,18.91 42.57,19.18 43.41,19.69 44.04,20.23 44.04,22.01 IC4.7 | v20.75,50.14 23.18,47.3
  Bottom 0.32: v32.32,36.41 v20.75,50.14
TXD
  Top 0.32: COMTXD.1 14.54,39.31 19,39.91 IC7.31

## Text on the board
Top: 2010 | STROBESHNIK